# Altium PCB Tester_REV_0.PcbDoc (part 1 of 3)
Units mm, origin at the board's own origin, x right, y up, seen from the top; angles counter-clockwise.
Board outline 150 x 150 mm, 2 copper layers (Top Layer, Bottom Layer); 109 components, 101 nets, 433 pads, 87 vias.
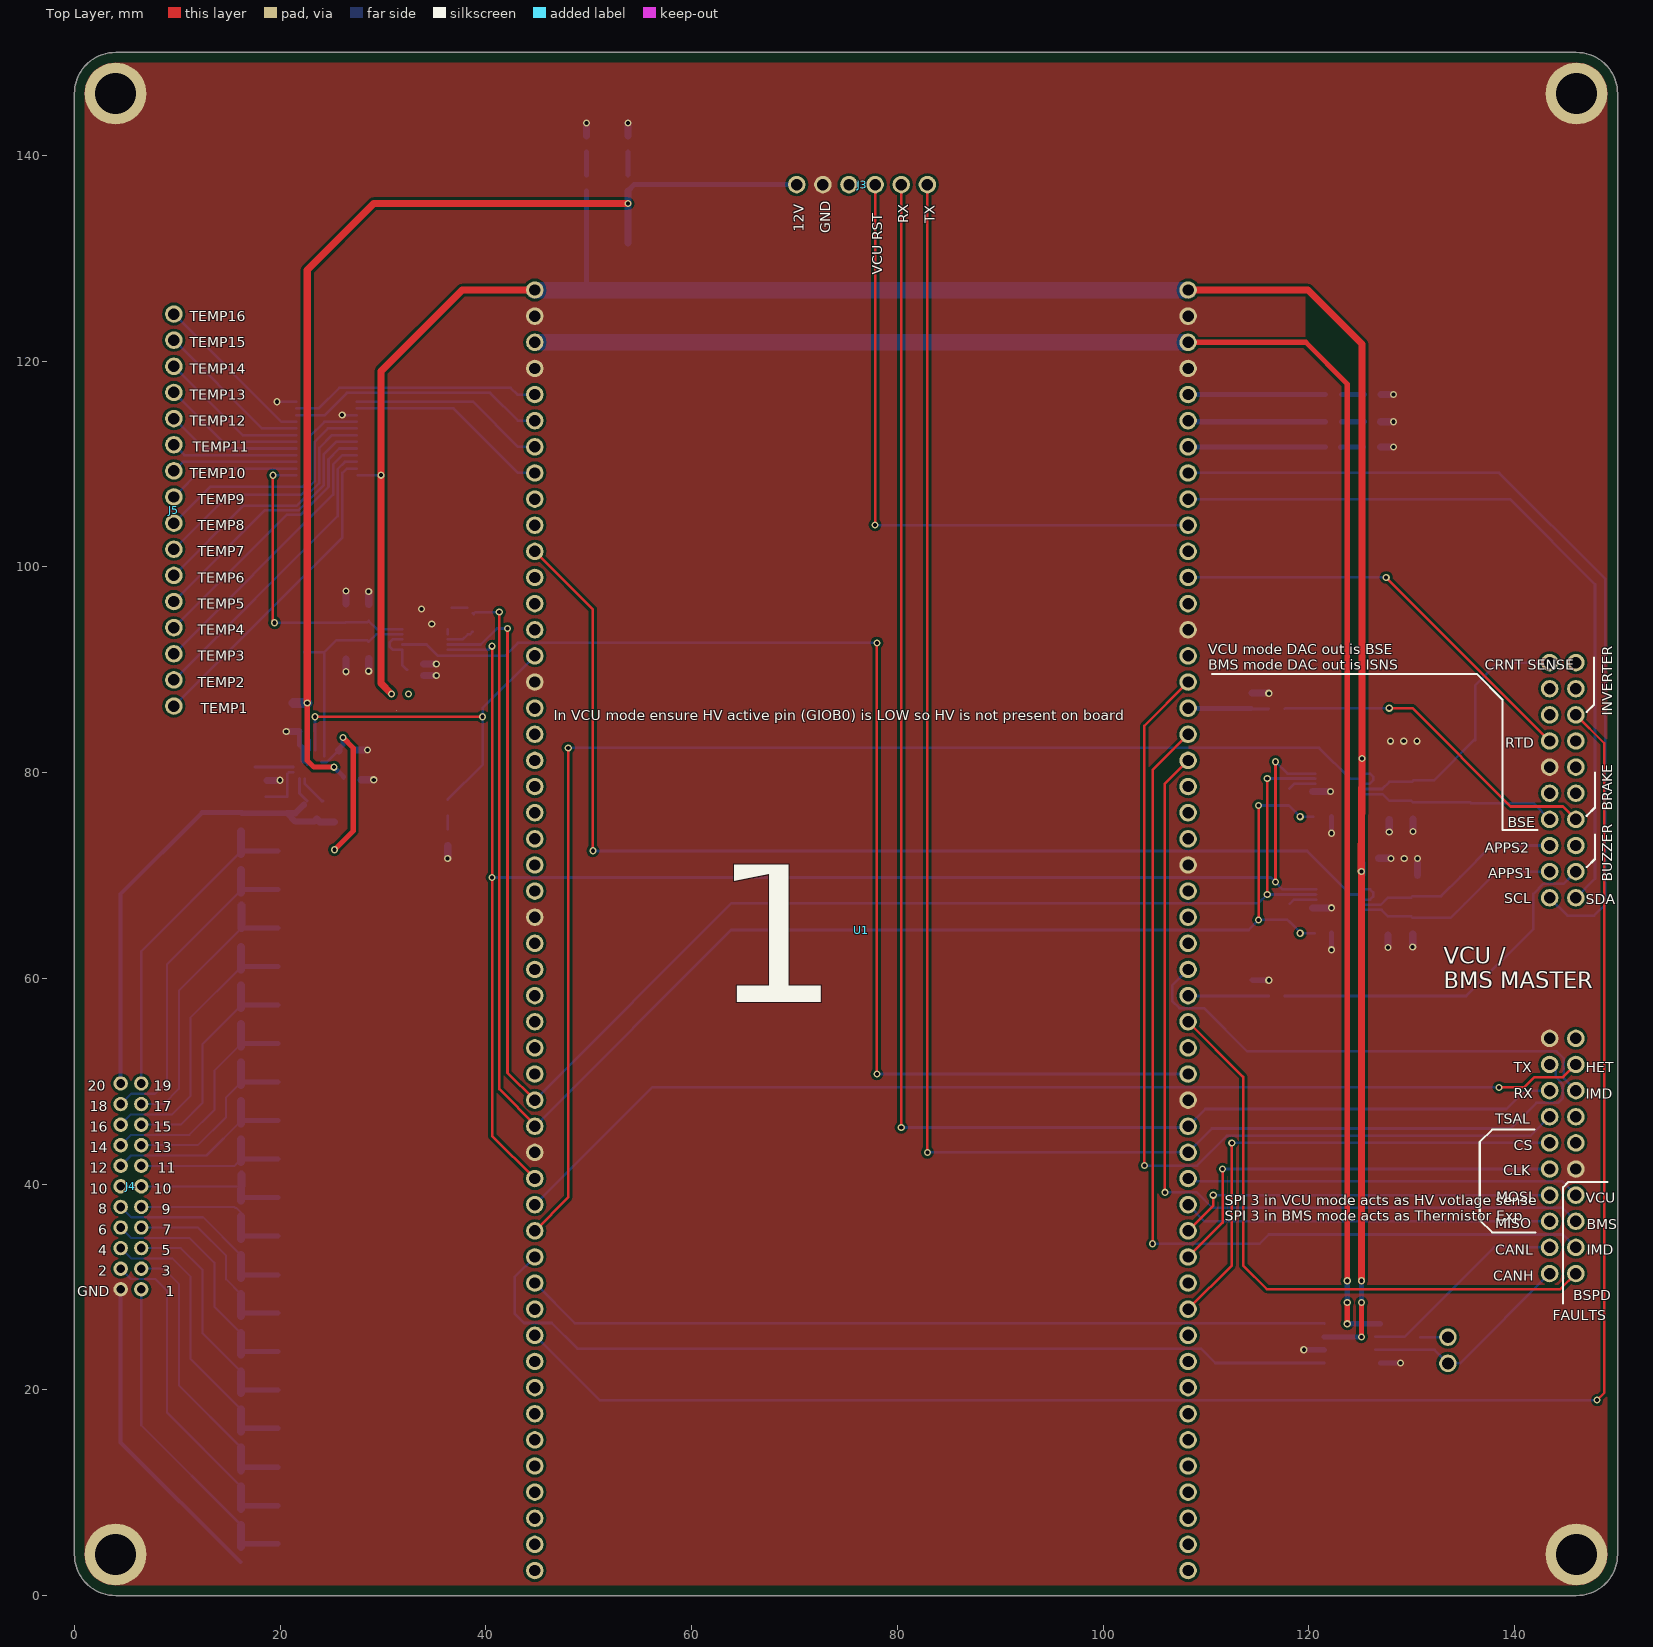
[diagram p0: Top Layer view]
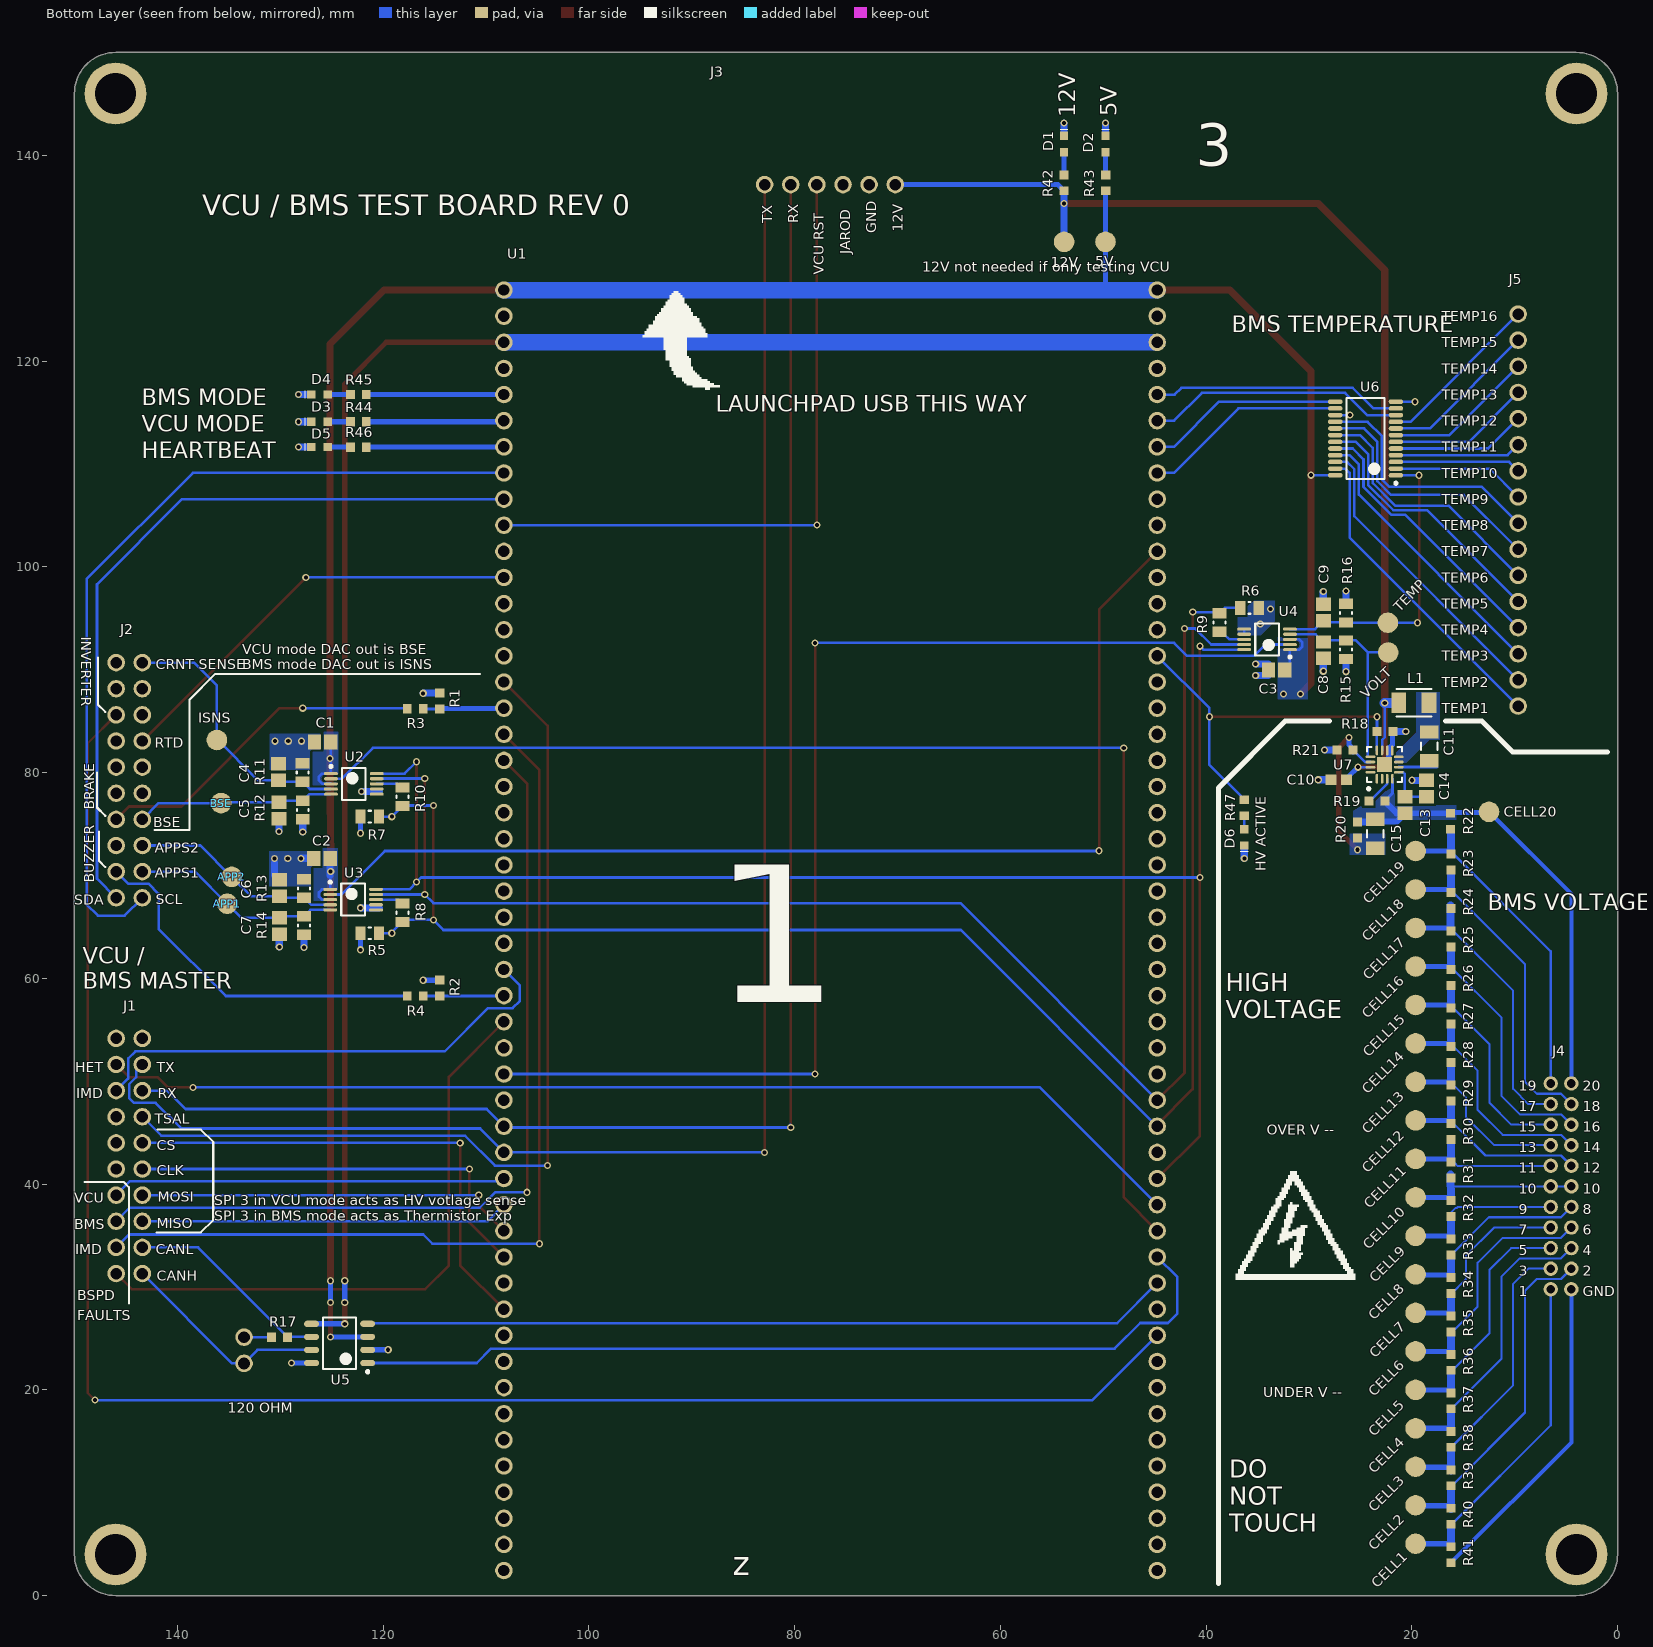
[diagram p1: Bottom Layer view, seen from below]
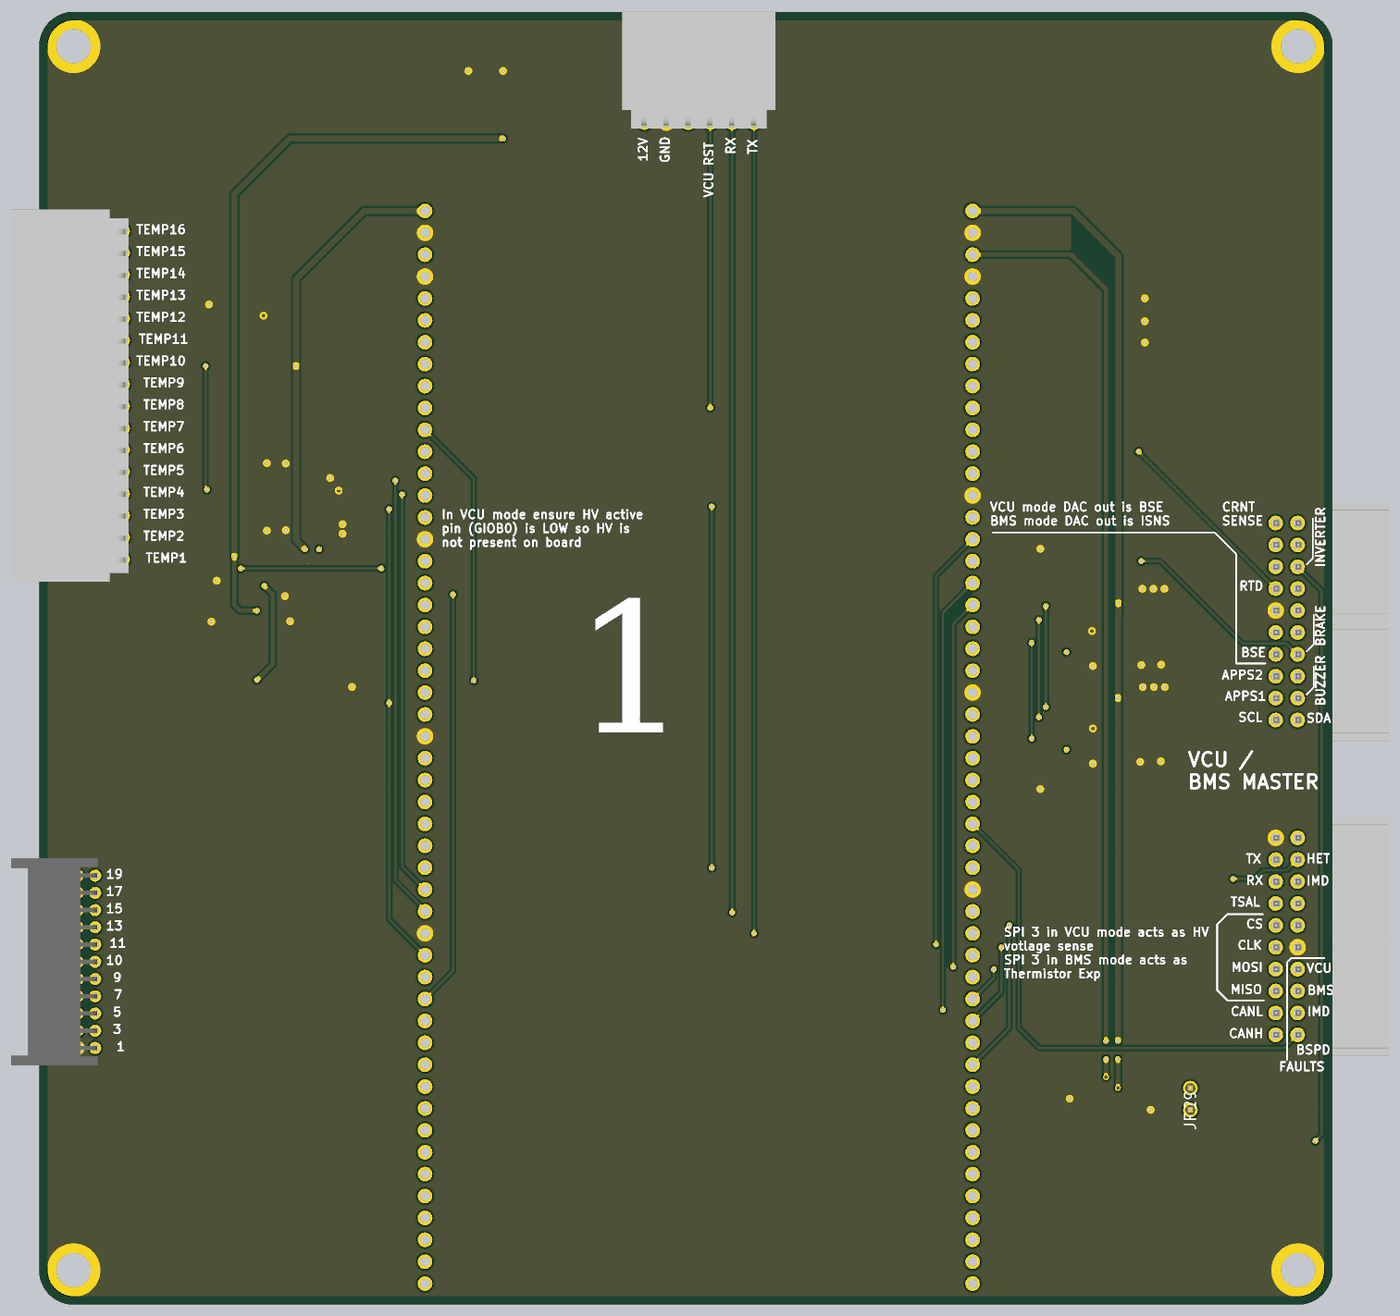
[diagram p3: 3D render of the assembled board from above, using the file's embedded part models]
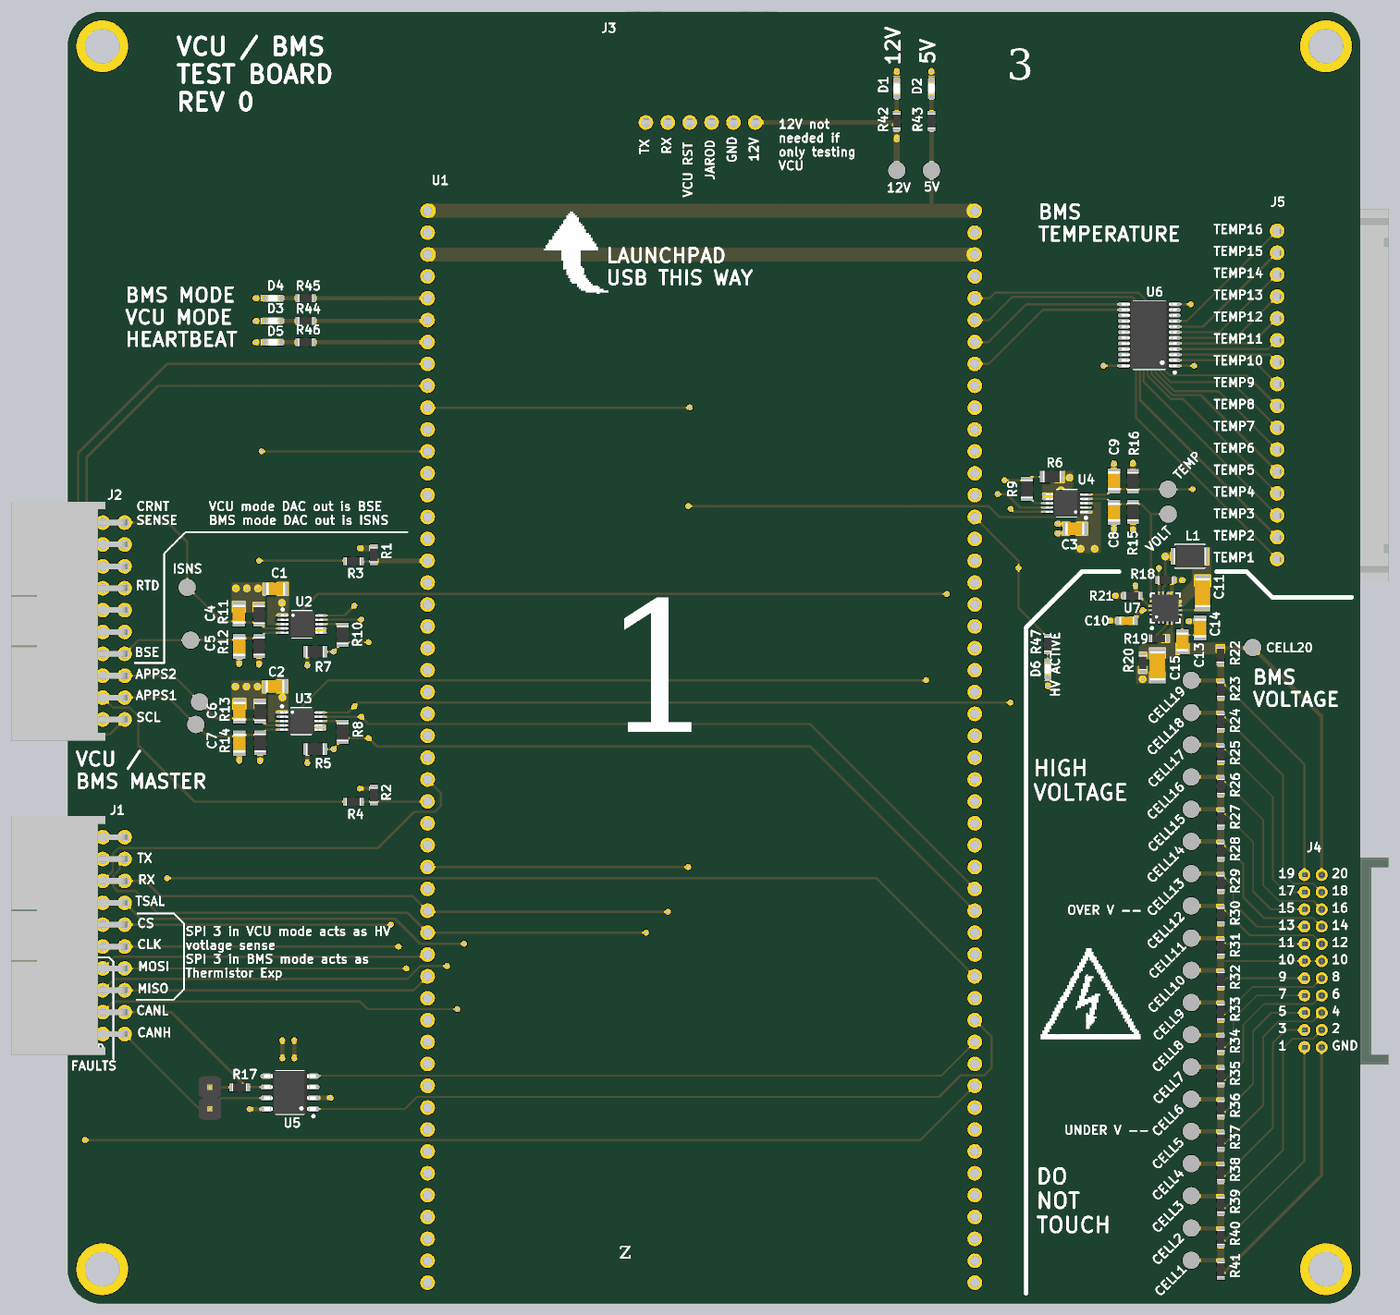
[diagram p4: 3D render of the assembled board from below, using the file's embedded part models]

## Layer stack, top to bottom
Top Solder: solder mask 0.0102, Solder Resist, Dk 3.5
Top Layer: signal copper 0.0356
Dielectric 1: dielectric 0.32, FR-4, Dk 4.8
Bottom Layer: signal copper 0.0356
Bottom Solder: solder mask 0.0102, Solder Resist, Dk 3.5

## Board outline
0,4 0,146 cw(c4,146) 4,150 146,150 cw(c146,146) 150,146 150,4 cw(c146,4) 146,0 4,0 cw(c4,4)

## Design rules (kind name [scope] priority, off if disabled: settings)
Clearance [All] p1: gap=0.254 ignorepadtopadclearanceinfootprint=FALSE except(0: Arc-Hole Track-Hole SMDPad-Hole THPad-Hole Via-Hole Fill-Hole Poly-Hole Region-Hole Text-Hole; 0.1: SMDPad-SMDPad; 0.15: Arc-Via Track-Via; 0.2: Arc-Arc Arc-Track Arc-SMDPad Arc-THPad Track-Track Track-SMDPad Track-THPad)
PlaneConnect [InNet('12V') or InNet('5V') or InNet('3V3') or InNet('GND')] p1: planeconnectstyle=Direct reliefexpansion=0.508 reliefentries=4 reliefconductorwidth=0.254 reliefairgap=0.254
PolygonConnect PolygonConnect_1 [InNet('12V') or InNet('5V') or InNet('3V3') or InNet('GND')] p1: connectstyle=Direct reliefconductorwidth=0.254 reliefentries=4 polygonreliefangle="90 Angle" airgapwidth=0.254
PolygonConnect PolygonConnect_2 [InNet('SW') or InNet('FB') or InNet('Batt_Volt')] p2: thpad.connectstyle=Relief thpad.reliefconductorwidth=0.254 thpad.reliefentries=4 thpad.polygonreliefangle="90 Angle" thpad.airgapwidth=0.254 smdpad.connectstyle=Direct smdpad.reliefconductorwidth=1 smdpad.reliefentries=4 smdpad.polygonreliefangle="90 Angle" smdpad.airgapwidth=0.254 via.connectstyle=Direct via.reliefconductorwidth=0.254 via.reliefentries=4 via.polygonreliefangle="90 Angle" via.airgapwidth=0.254
PolygonConnect [All] p3: connectstyle=Relief reliefconductorwidth=0.254 reliefentries=4 polygonreliefangle="90 Angle" airgapwidth=0.254
RoutingVias [All] p1: holewidth=0.4 width=0.7 viastyle="Through Hole" minholewidth=0.3 minwidth=0.6 maxholewidth=1 maxwidth=2
SolderMaskExpansion [All] p1: expansion=0.102
Width [All] p1: maxlimit=3 minlimit=0.15 preferedwidth=0.254 minimp=50.000000 maximp=50.000000 favimp=50.000000
29 further rules are at their usual default settings.

## Classes and differential pairs
net class CELL[19..0]: CELL1 CELL2 CELL3 CELL4 CELL5 CELL6 CELL7 CELL8 CELL9 CELL10 CELL11 CELL12 CELL13 CELL14 CELL15 CELL16 CELL17 CELL18 CELL19
component class U_Launchpad: D1 D2 D3 D4 D5 R1 R2 R3 R4 R42 R43 R44 R45 R46
component class U_DAC: 5V APP1 APP2 BSE C1 C2 C3 C4 C5 C6 C7 C8 C9 ISNS R5 R6 R7 R8 R9 R10 R11 R12 R13 R14 R15 R16 TEMP U2 U3 U4 VOLT
component class U_Connectors: 12v J1 J2 J3 J4 J5
component class U_CAN: R17 U5
component class U_BMS_Voltage: C10 C11 C13 C14 C15 CELL20 JP1 JP2 JP3 JP4 JP5 JP6 JP7 JP8 JP9 JP10 JP11 JP12 JP13 JP14 JP15 JP16 JP17 JP18 JP19 L1 R18 R19 R20 R21 R22 R23 R24 R25 R26 R27 R28 R29 R30 R31 R32 R33 R34 R35 R36 R37 R38 R39 R40 R41 U7
component class U_BMS_Temp: U6

## Components (designator, comment, footprint, x,y, rotation, side; value= is the part's Value field where it differs from the comment)
5V "Testpoint2" TP2 49.78,131.585 r90 bottom (schematic designator JP21)
12V "Testpoint2" TP2 53.799,131.585 r90 bottom (schematic designator JP28)
"120 OHM" "732-5315-ND" 2PIN-JP 133.5,22.578 r90 bottom (schematic designator JP29)
APP1 "Testpoint2" TP2 135.143,67.249 r270 bottom (schematic designator JP25)
APP2 "Testpoint2" TP2 134.709,69.864 r270 bottom (schematic designator JP24)
BSE "Testpoint2" TP2 135.743,77.034 r270 bottom (schematic designator JP23)
C1 "0.1uF" CAP-0805 125.865,82.985 r180 bottom
C2 "0.1uF" CAP-0805 125.944,71.663 r180 bottom
C3 "0.1uF" CAP-0805 33.14,89.979 r180 bottom
C4 "100nF" CAP-0805 130.149,80.049 r90 bottom
C5 "100nF" CAP-0805 130.107,76.299 r90 bottom
C6 "100nF" CAP-0805 130.078,68.784 r90 bottom
C7 "100nF" CAP-0805 130.078,65.075 r90 bottom
C8 "100nF" CAP-0805 28.604,91.895 r270 bottom
C9 "100nF" CAP-0805 28.604,95.545 r270 bottom
C10 "1uF" CAP-0603 27.11,79.293 r180 bottom
C11 "0.1uF" CAP-1206 18.31,82.548 r90 bottom
C13 "0.47uF" CAP-0805 20.673,76.843 r270 bottom
C14 "0.47uF" CAP-0805 18.59,78.453 r270 bottom
C15 "0.1uF" CAP-1206 23.565,74.059 r90 bottom
CELL1 "Testpoint2" TP2 19.633,5.04 r180 bottom (schematic designator JP1)
CELL2 "Testpoint2" TP2 19.633,8.781 r180 bottom (schematic designator JP2)
CELL3 "Testpoint2" TP2 19.633,12.521 r180 bottom (schematic designator JP3)
CELL4 "Testpoint2" TP2 19.633,16.262 r180 bottom (schematic designator JP4)
CELL5 "Testpoint2" TP2 19.633,20.003 r180 bottom (schematic designator JP5)
CELL6 "Testpoint2" TP2 19.633,23.744 r180 bottom (schematic designator JP6)
CELL7 "Testpoint2" TP2 19.633,27.485 r180 bottom (schematic designator JP7)
CELL8 "Testpoint2" TP2 19.633,31.225 r180 bottom (schematic designator JP8)
CELL9 "Testpoint2" TP2 19.633,34.966 r180 bottom (schematic designator JP9)
CELL10 "Testpoint2" TP2 19.633,38.707 r90 bottom (schematic designator JP10)
CELL11 "Testpoint2" TP2 19.633,42.448 r90 bottom (schematic designator JP11)
CELL12 "Testpoint2" TP2 19.633,46.189 r90 bottom (schematic designator JP12)
CELL13 "Testpoint2" TP2 19.633,49.929 r90 bottom (schematic designator JP13)
CELL14 "Testpoint2" TP2 19.633,53.67 r90 bottom (schematic designator JP14)
CELL15 "Testpoint2" TP2 19.633,57.411 r90 bottom (schematic designator JP15)
CELL16 "Testpoint2" TP2 19.633,61.152 r90 bottom (schematic designator JP16)
CELL17 "Testpoint2" TP2 19.633,64.893 r90 bottom (schematic designator JP17)
CELL18 "Testpoint2" TP2 19.633,68.633 r90 bottom (schematic designator JP18)
CELL19 "Testpoint2" TP2 19.633,72.374 r90 bottom (schematic designator JP19)
CELL20 "Testpoint2" TP2 12.5,76.185 r90 bottom (schematic designator JP20)
D1 "Blue" LED-0603 54.6,142.3 r270 bottom
D2 "Green" LED-0603 50.58,142.3 r270 bottom
D3 "Blue" LED-0603 127.381,113.295 r180 bottom
D4 "Yellow" LED-0603 127.381,115.955 r180 bottom
D5 "Red" LED-0603 127.381,110.83 r180 bottom
D6 "Red" LED-0603 35.485,72.5 r90 bottom
ISNS "Testpoint2" TP2 136.143,83.164 r270 bottom (schematic designator JP22)
J1 "WM8268-ND" 2X10PIN 145.937,54.165 r270 bottom
J2 "WM8268-ND" 2X10PIN 145.937,90.69 r270 bottom
J3 "WM4928-ND" 6PIN 82.911,137.149 r180 top
J4 "H10253-ND" 2X11PIN 6.5,29.779 r90 top
J5 "WM4914-ND" 16PIN 9.669,124.565 r270 top
L1 "10uH" IND-3.2x2.5x2.2 19.801,86.785 r180 bottom
R1 "5K" RES-0603 114.479,86.95 r270 bottom
R2 "5K" RES-0603 114.479,59.055 r270 bottom
R3 "15K" RES-0603 116.864,86.2 r0 bottom
R4 "15K" RES-0603 116.864,58.28 r0 bottom
R5 "2K" RES-0805 121.294,64.385 r180 bottom
R6 "2K" RES-0805 35.789,96.009 r0 bottom
R7 "2K" RES-0805 121.294,75.714 r180 bottom
R8 "1K" RES-0805 118.108,66.375 r90 bottom
R9 "1K" RES-0805 38.704,94.595 r270 bottom
R10 "1K" RES-0805 118.108,77.649 r90 bottom
R11 "10k" RES-0805 127.813,79.999 r90 bottom
R12 "10k" RES-0805 127.807,76.349 r90 bottom
R13 "10k" RES-0805 127.678,68.734 r90 bottom
R14 "10k" RES-0805 127.678,65.125 r90 bottom
R15 "10k" RES-0805 26.404,91.945 r270 bottom
R16 "10k" RES-0805 26.404,95.495 r270 bottom
R17 "120R" RES-0603 130.064,25.118 r0 bottom
R18 "10K" RES-0603 22.61,83.998 r0 bottom
R19 "0R" RES-0603 23.394,77.236 r180 bottom
R20 "665K" RES-0603 25.276,74.409 r90 bottom
R21 "8.06K" RES-0603 26.49,82.201 r180 bottom
R22 "10K" RES-0603 16.25,75.27 r90 bottom
R23 "10K" RES-0603 16.2,71.299 r90 bottom
R24 "10K" RES-0603 16.2,67.558 r90 bottom
R25 "10K" RES-0603 16.2,63.818 r90 bottom
R26 "10K" RES-0603 16.2,60.077 r90 bottom
R27 "10K" RES-0603 16.2,56.336 r90 bottom
R28 "10.5K" RES-0603 16.2,52.595 r90 bottom
R29 "10K" RES-0603 16.2,48.854 r90 bottom
R30 "10K" RES-0603 16.2,45.114 r90 bottom
R31 "10K" RES-0603 16.2,41.373 r90 bottom
R32 "10K" RES-0603 16.2,37.632 r90 bottom
R33 "10K" RES-0603 16.2,33.891 r90 bottom
R34 "10K" RES-0603 16.2,30.15 r90 bottom
R35 "9.5K" RES-0603 16.2,26.41 r90 bottom
R36 "10K" RES-0603 16.2,22.669 r90 bottom
R37 "10K" RES-0603 16.2,18.928 r90 bottom
R38 "10K" RES-0603 16.2,15.187 r90 bottom
R39 "10K" RES-0603 16.2,11.446 r90 bottom
R40 "10K" RES-0603 16.2,7.706 r90 bottom
R41 "10K" RES-0603 16.2,3.965 r90 bottom
R42 "2K" RES-0603 53.8,137.315 r270 bottom
R43 "665R" RES-0603 49.764,137.315 r270 bottom
R44 "22R" RES-0603 122.395,114.095 r180 bottom
R45 "22R" RES-0603 122.395,116.755 r180 bottom
R46 "22R" RES-0603 122.395,111.63 r180 bottom
R47 "22R" RES-0603 36.285,76.585 r90 bottom
TEMP "Testpoint2" TP2 22.335,94.56 r270 bottom (schematic designator JP27)
U1 "LAUNCHXL2-TMS57012" Hercules 44.751,126.9 r270 top
U2 "MCP48FVB02-E/UN DAC1" 10MSOP 122.837,78.9 r180 bottom
U3 "MCP48FVB02-E/UN DAC2" 10MSOP 122.908,67.65 r180 bottom
U4 "MCP48FVB02-E/UN DAC3" 10MSOP 34.075,92.944 r0 bottom
U5 "MCP2562T-E/SNCT-ND" "8-SOIC w/o THRM" 124.219,24.515 r0 bottom
U6 "74HC4067PW,118" 24-TSSOP 24.5,112.47 r0 bottom
U7 "LT3482EUD#TRPBF" "QFN-16 (3x3mm)" 22.646,80.774 r90 bottom
VOLT "Testpoint2" TP2 22.297,91.669 r270 bottom (schematic designator JP26)

## Footprints (in the part's own frame and the unit in brackets; to place one, negate y for a bottom-side part, rotate by r counter-clockwise, add the part's x,y. Pads: shape width x height; smd on the part's side, far side on the other; paste and mask are expansions set on the pad)
2PIN-JP [mm]
  round 1.7 hole 1.15: 1(0,0) 2(2.54,0)
  body extent -1.24,-1.27 3.84,1.27, height 8.57
2X10PIN [mm]
  round 1.7 hole 1.11: 1(0,0) 2(2.54,0) 3(5.08,0) 4(7.62,0) 5(10.16,0) 6(12.7,0) 7(15.24,0) 8(17.78,0) 9(20.32,0) 10(22.86,0) 11(22.86,2.54) 12(20.32,2.54) 13(17.78,2.54) 14(15.24,2.54) 15(12.7,2.54) 16(10.16,2.54) 17(7.62,2.54) 18(5.08,2.54) 19(2.54,2.54) 20(0,2.54)
  body extent -2.44,-10.6 25.3,2.8, height 9.88
2X11PIN [mm]
  round 1.4 hole 0.85: 1(0,0) 2(2,0) 3(4,0) 4(6,0) 5(8,0) 6(10,0) 7(12,0) 8(14,0) 9(16,0) 10(18,0) 11(20,0) 12(20,2) 13(18,2) 14(16,2) 15(14,2) 16(12,2) 17(10,2) 18(8,2) 19(6,2) 20(4,2) 21(2,2) 22(0,2)
  body extent -2,-0.27 22,9.73, height 5.66
6PIN [mm]
  round 1.7 hole 1.11: 1(0,0) 2(2.54,0) 3(5.08,0) 4(7.62,0) 5(10.16,0) 6(12.7,0)
  body extent -2.48,-12.89 15.3,0.7, height 7.06
"8-SOIC w/o THRM" [mm] "SOIC, 8-Leads, Body 4.90x3.90mm, Pitch 1.27mm, IPC Medium Density"
  oval 1.45x0.6 smd: 1(-2.725,1.905) 2(-2.725,0.635) 3(-2.725,-0.635) 4(-2.725,-1.905) 5(2.725,-1.905) 6(2.725,-0.635) 7(2.725,0.635) 8(2.725,1.905)
  silkscreen extent -2.85,-2.5 1.6,2.88, body extent -3,-2.5 3,2.5, height 1.7
10MSOP [mm] "TSSOP, 10-Leads, Body 3.00x3.00mm, Pitch 0.50mm, IPC Medium Density"
  oval 1.35x0.3 smd: 1(-2.225,1) 2(-2.225,0.5) 3(-2.225,0) 4(-2.225,-0.5) 5(-2.225,-1) 6(2.225,-1) 7(2.225,-0.5) 8(2.225,0) 9(2.225,0.5) 10(2.225,1)
  silkscreen extent -2.35,-1.55 1.15,1.82, body extent -2.45,-1.55 2.45,1.55, height 1.1
16PIN [mm]
  round 1.7 hole 1.11: 1(0,0) 2(2.54,0) 3(5.08,0) 4(7.62,0) 5(10.16,0) 6(12.7,0) 7(15.24,0) 8(17.78,0) 9(20.32,0) 10(22.86,0) 11(25.4,0) 12(27.94,0) 13(30.48,0) 14(33.02,0) 15(35.56,0) 16(38.1,0)
  body extent -2.48,-12.89 40.7,0.69, height 7.06
24-TSSOP [mm] "TSOP, 24-Leads, Body 7.80x4.40mm, Pitch 0.65mm, IPC Medium Density"
  oval 1.4x0.45 smd: 1(-2.95,3.575) 2(-2.95,2.925) 3(-2.95,2.275) 4(-2.95,1.625) 5(-2.95,0.975) 6(-2.95,0.325) 7(-2.95,-0.325) 8(-2.95,-0.975) 9(-2.95,-1.625) 10(-2.95,-2.275) 11(-2.95,-2.925) 12(-2.95,-3.575) 13(2.95,-3.575) 14(2.95,-2.925) 15(2.95,-2.275) 16(2.95,-1.625) 17(2.95,-0.975) 18(2.95,-0.325) 19(2.95,0.325) 20(2.95,0.975) 21(2.95,1.625) 22(2.95,2.275) 23(2.95,2.925) 24(2.95,3.575)
  silkscreen extent -3.07,-3.95 1.85,4.47, body extent -3.2,-3.95 3.2,3.95, height 1.1
CAP-0603 [mm] "Chip Capacitor, 2-Leads, Body 1.60x0.80mm, IPC Medium Density"
  rect 1.05x1 smd: 1(-0.75,0) 2(0.75,0)
  body extent -0.87,-0.48 0.88,0.47, height 0.9
CAP-0805 [mm] "Chip Capacitor, 2-Leads, Body 2.00x1.25mm, IPC Medium Density"
  rect 1.3x1.45 smd: 1(-0.8,0) 2(0.8,0)
  body extent -1.1,-0.72 1.1,0.72, height 1.35
CAP-1206 [mm] "Chip Capacitor, 2-Leads, Body 3.20x1.60mm, IPC Medium Density"
  rect 1.3x1.8 smd: 1(-1.4,0) 2(1.4,0)
  silkscreen extent -0.35,-0.8 0.35,0.8, body extent -1.7,-0.9 1.7,0.9, height 1.7
Hercules [mm]
  round 1.7 hole 1.1: 1(0,0) 2(2.54,0) 3(5.08,0) 4(7.62,0) 5(10.16,0) 6(12.7,0) 7(15.24,0) 8(17.78,0) 9(20.32,0) 10(22.86,0) 11(25.4,0) 12(27.94,0) 13(30.48,0) 14(33.02,0) 15(35.56,0) 16(38.1,0) 17(40.64,0) 18(43.18,0) 19(45.72,0) 20(48.26,0) 21(50.8,0) 22(53.34,0) 23(55.88,0) 24(58.42,0) 25(60.96,0) 26(63.5,0) 27(66.04,0) 28(68.58,0) 29(71.12,0) 30(73.66,0) 31(76.2,0) 32(78.74,0) 33(81.28,0) 34(83.82,0) 35(86.36,0) 36(88.9,0) 37(91.44,0) 38(93.98,0) 39(96.52,0) 40(99.06,0) 41(101.6,0) 42(104.14,0) 43(106.68,0) 44(109.22,0) 45(111.76,0) 46(114.3,0) 47(116.84,0) 48(119.38,0) 49(121.92,0) 50(124.46,0) 51(0,63.5) 52(2.54,63.5) 53(5.08,63.5) 54(7.62,63.5) 55(10.16,63.5) 56(12.7,63.5) 57(15.24,63.5) 58(17.78,63.5) 59(20.32,63.5) 60(22.86,63.5) 61(25.4,63.5) 62(27.94,63.5) 63(30.48,63.5) 64(33.02,63.5) 65(35.56,63.5) 66(38.1,63.5) 67(40.64,63.5) 68(43.18,63.5) 69(45.72,63.5) 70(48.26,63.5) 71(50.8,63.5) 72(53.34,63.5) 73(55.88,63.5) 74(58.42,63.5) 75(60.96,63.5) 76(63.5,63.5) 77(66.04,63.5) 78(68.58,63.5) 79(71.12,63.5) 80(73.66,63.5) 81(76.2,63.5) 82(78.74,63.5) 83(81.28,63.5) 84(83.82,63.5) 85(86.36,63.5) 86(88.9,63.5) 87(91.44,63.5) 88(93.98,63.5) 89(96.52,63.5) 90(99.06,63.5) 91(101.6,63.5) 92(104.14,63.5) 93(106.68,63.5) 94(109.22,63.5) 95(111.76,63.5) 96(114.3,63.5) 97(116.84,63.5) 98(119.38,63.5) 99(121.92,63.5) 100(124.46,63.5)
IND-3.2x2.5x2.2 [mm] "Molded Inductor, 2-Leads, Body 3.20x2.50mm, IPC Medium Density"
  rect 1.45x1.95 smd: 1(-1.475,0) 2(1.475,0)
  silkscreen extent -1.7,-1.35 1.7,1.35, body extent -1.92,-1.35 1.92,1.35, height 2.4
LED-0603 [mm]
  rect 0.8x0.8 smd: 1(2,0.8) 2(0.4,0.8)
  silkscreen extent -0.18,0.43 -0.18,1.17, body extent 0.4,0.4 2,1.2, height 0.7
"QFN-16 (3x3mm)" [mm] "QFN, 16-Leads, Body 3.00x3.00mm, Pitch 0.50mm, Thermal Pad 1.45x1.45mm, IPC Medium Density"
  oval 0.95x0.25 smd: 1(-1.375,0.75) 2(-1.375,0.25) 3(-1.375,-0.25) 4(-1.375,-0.75) 9(1.375,-0.75) 10(1.375,-0.25) 11(1.375,0.25) 12(1.375,0.75)
  oval 0.25x0.95 smd: 5(-0.75,-1.375) 6(-0.25,-1.375) 7(0.25,-1.375) 8(0.75,-1.375) 13(0.75,1.375) 14(0.25,1.375) 15(-0.25,1.375) 16(-0.75,1.375)
  rect 1.45x1.45 smd: 17(0,0)
  silkscreen extent -2.47,-1.7 1.7,1.7, body extent -1.55,-1.55 1.55,1.55, height 0.8
RES-0603 [mm] "Chip Resistor, 2-Leads, Body 1.60x0.80mm, IPC Medium Density"
  rect 0.85x0.9 smd: 1(-0.775,0) 2(0.775,0)
  body extent -0.85,-0.45 0.85,0.45, height 0.55
RES-0805 [mm] "Chip Resistor, 2-Leads, Body 2.00x1.25mm, IPC Medium Density"
  rect 1x1.35 smd: 1(-0.9,0) 2(0.9,0)
  silkscreen extent -0.1,-0.58 0.1,0.58, body extent -1.05,-0.68 1.05,0.67, height 0.6
TP2 [mm]
  round 2 smd: 1(0,0)

## Part data
5V 12V APP1 APP2 BSE CELL1 CELL2 CELL3 CELL4 CELL5 CELL6 CELL7 CELL8 CELL9 CELL10 CELL11 CELL12 CELL13 CELL14 CELL15 CELL16 CELL17 CELL18 CELL19 CELL20 ISNS TEMP VOLT: "Single layer pad TP"
"120 OHM": library part 2PIN-TEST, "CONN HEADER VERT 2POS 2.54MM"
C1 C2 C3: library part 0805-0.1uF-16V, "CAP CER 0.1UF 16V Y5V 0805", Capacitance=100nF, Case/Package=0805, Case Code (Metric)=2012, Dielectric=Y5V, Dielectric Material=Ceramic, Manufacturer=KEMET, Manufacturer Part Number=C0805C104Z4VACTU, Max Operating Temperature=85°C, Min Operating Temperature=-30°C, Package Quantity=1, Supplier Part Number 1=399-9159-6-ND, Tolerance=80%, Voltage Rating=16V, Case Code (Imperial)=0805, ComponentLink1Description=https://search.kemet.com/component-edge/download/datasheet/C0805C104Z4VACTU.pdf?src-supplier=Digi-Key, ComponentLink1URL=https://search.kemet.com/component-edge/download/datasheet/C0805C104Z4VACTU.pdf?src-supplier=Digi-Key, ComponentLink2Description=https://api.kemet.com/component-edge/download/datasheet/C0805C104Z4VACTU.pdf?src-supplier=Digi-Key, ComponentLink2URL=https://api.kemet.com/component-edge/download/datasheet/C0805C104Z4VACTU.pdf?src-supplier=Digi-Key, ComponentLink3Description=http://www.mouser.com/ds/2/212/KEM_C1005_Y5V_SMD-1101305.pdf?src-supplier=Mouser, ComponentLink3URL=http://www.mouser.com/ds/2/212/KEM_C1005_Y5V_SMD-1101305.pdf?src-supplier=Mouser, ComponentLink4Description=http://components.arrow.com/part/dataview/2091119S8993596N7429?src-supplier=Arrow, ComponentLink4URL=http://components.arrow.com/part/dataview/2091119S8993596N7429?src-supplier=Arrow, Depth=1.25mm, Height=0.78mm, Lead Free="Lead Free", Lead Pitch=0.75mm, Length=2mm, Mount="Surface Mount", Packaging="Tape and Reel", Pricing 1="1=0.11, 10=0.081, 100=0.038, 500=0.02664, 1000=0.02205 (USD)", Stock 1=18565, Supplier 1=Digi-Key, Termination=SMD/SMT, Thickness=0.035inch, Voltage Rating (DC)=16V, Width=0.049inch
C4 C5 C6 C7 C8 C9: library part 0805-0.1uF-16V, "CAP CER 0.1UF 16V Y5V 0805", Case/Package=0805, Case Code (Metric)=2012, Dielectric=Y5V, Dielectric Material=Ceramic, Manufacturer=KEMET, Manufacturer Part Number=C0805C104Z4VACTU, Max Operating Temperature=85°C, Min Operating Temperature=-30°C, Package Quantity=1, Supplier Part Number 1=399-9159-6-ND, Tolerance=80%, Voltage Rating=16V, Capacitance=100nF, Case Code (Imperial)=0805, ComponentLink1Description=https://search.kemet.com/component-edge/download/datasheet/C0805C104Z4VACTU.pdf?src-supplier=Digi-Key, ComponentLink1URL=https://search.kemet.com/component-edge/download/datasheet/C0805C104Z4VACTU.pdf?src-supplier=Digi-Key, ComponentLink2Description=https://api.kemet.com/component-edge/download/datasheet/C0805C104Z4VACTU.pdf?src-supplier=Digi-Key, ComponentLink2URL=https://api.kemet.com/component-edge/download/datasheet/C0805C104Z4VACTU.pdf?src-supplier=Digi-Key, ComponentLink3Description=http://www.mouser.com/ds/2/212/KEM_C1005_Y5V_SMD-1101305.pdf?src-supplier=Mouser, ComponentLink3URL=http://www.mouser.com/ds/2/212/KEM_C1005_Y5V_SMD-1101305.pdf?src-supplier=Mouser, ComponentLink4Description=http://components.arrow.com/part/dataview/2091119S8993596N7429?src-supplier=Arrow, ComponentLink4URL=http://components.arrow.com/part/dataview/2091119S8993596N7429?src-supplier=Arrow, Depth=1.25mm, Height=0.78mm, Lead Free="Lead Free", Lead Pitch=0.75mm, Length=2mm, Mount="Surface Mount", Packaging="Tape and Reel", Pricing 1="1=0.11, 10=0.081, 100=0.038, 500=0.02664, 1000=0.02205 (USD)", Stock 1=18565, Supplier 1=Digi-Key, Termination=SMD/SMT, Thickness=0.035inch, Voltage Rating (DC)=16V, Width=0.049inch
C10: library part 0603-1uF-16V, "CAP CER 1UF 16V X7R 0603", Case/Package=0603, Case Code (Metric)=1608, Dielectric=X7R, Dielectric Material=Ceramic, Manufacturer=KEMET, Manufacturer Part Number=C0603C105K4RACTU, Max Operating Temperature=125°C, Min Operating Temperature=-55°C, Package Quantity=4000, Supplier Part Number 1=399-7847-6-ND, Tolerance=10%, Voltage=16V, Capacitance=1uF, Case Code (Imperial)=0603, ComponentLink1Description=http://www.mouser.com/ds/2/212/KEM_C1002_X7R_SMD-1102033.pdf?src-supplier=Mouser, ComponentLink1URL=http://www.mouser.com/ds/2/212/KEM_C1002_X7R_SMD-1102033.pdf?src-supplier=Mouser, ComponentLink2Description=http://www.kemet.com/kemet/web/homepage/kechome.nsf/file/Commercial%20Ceramic%20Chips%20X7R%20Dielectric/$file/KEM_C1002_X7R_SMD.pdf?src-supplier=Element14, ComponentLink2URL=http://www.kemet.com/kemet/web/homepage/kechome.nsf/file/Commercial%20Ceramic%20Chips%20X7R%20Dielectric/$file/KEM_C1002_X7R_SMD.pdf?src-supplier=Element14, ComponentLink3Description=https://www.verical.com/server-webapp/html/getDatasheet?partID=385479&src-supplier=Verical, ComponentLink3URL=https://www.verical.com/server-webapp/html/getDatasheet?partID=385479&src-supplier=Verical, ComponentLink4Description=http://www.kemet.com/kemet/web/homepage/kechome.nsf/vapubfiles/KEM_C1002_X7R_SMD.pdf/$file/KEM_C1002_X7R_SMD.pdf?src-supplier=Element14, ComponentLink4URL=http://www.kemet.com/kemet/web/homepage/kechome.nsf/vapubfiles/KEM_C1002_X7R_SMD.pdf/$file/KEM_C1002_X7R_SMD.pdf?src-supplier=Element14, Contact Plating=Tin,Matte, Depth=0.8mm, Dissipation Factor=3.5%, Height=0.8mm, Length=1.6mm, Mount="Surface Mount,PCB", Number of Pins=2, Packaging="Tape and Reel", Pricing 1="1=0.12, 10=0.088, 100=0.0391, 500=0.02792, 1000=0.02193 (USD)", Radiation Hardening=No, REACH SVHC="No SVHC", Stock 1=600463, Supplier 1=Digi-Key, Termination=SMD/SMT, Thickness=0.034inch, Voltage Rating=16V, Voltage Rating (DC)=16V, Width=0.031inch
C11 C15: library part 1206-0.1uF-100V, "CAP CER 0.1UF 100V X7R 1206", Capacitance=100nF, Case/Package=1206, Case Code (Metric)=3216, Dielectric=X7R, Dielectric Material=Ceramic, Manufacturer=KEMET, Manufacturer Part Number=C1206C104K1RACTU, Max Operating Temperature=125°C, Min Operating Temperature=-55°C, Package Quantity=1, Supplier Part Number 1=399-1805-6-ND, Tolerance=10%, Voltage=100V, Case Code (Imperial)=1206, ComponentLink1Description=http://www.farnell.com/datasheets/2740715.pdf?src-supplier=Element14, ComponentLink1URL=http://www.farnell.com/datasheets/2740715.pdf?src-supplier=Element14, ComponentLink2Description=https://search.kemet.com/component-edge/download/datasheet/C1206C104K1RACTU.pdf?src-supplier=Allied+Electronics, ComponentLink2URL=https://search.kemet.com/component-edge/download/datasheet/C1206C104K1RACTU.pdf?src-supplier=Allied+Electronics, Contact Plating=Tin,Matte, Depth=1.6mm, Height=0.78mm, Length=3.2mm, Mount="Surface Mount,PCB", Number of Pins=2, Packaging="Tape and Reel", Pricing 1="1=0.28, 10=0.19, 100=0.1075, 500=0.0759, 1000=0.06641 (USD)", Radiation Hardening=No, REACH SVHC="No SVHC", Stock 1=407754, Supplier 1=Digi-Key, Termination=SMD/SMT, Thickness=0.035inch, Voltage Rating=100V, Voltage Rating (DC)=100V, Width=1.6mm
C13 C14: library part 0805-0.47uF-100V, "CAP CER 0.47UF 100V X7S 0805", Capacitance=470nF, Case/Package=0805, Case Code (Metric)=2012, Dielectric=X7S, Manufacturer=TDK, Manufacturer Part Number=C2012X7S2A474M125AB, Max Operating Temperature=125°C, Min Operating Temperature=-55°C, Package Quantity=1, Resistor Type=Ceramic, Supplier Part Number 1=445-5204-6-ND, Tolerance=20%, Voltage Rating=100V, Case Code (Imperial)=0805, ComponentLink1Description=http://www.mouser.com/ds/2/400/lcc_commercial_general_en-837201.pdf?src-supplier=Mouser, ComponentLink1URL=http://www.mouser.com/ds/2/400/lcc_commercial_general_en-837201.pdf?src-supplier=Mouser, Depth=1.25mm, Length=2mm, Mount="Surface Mount", Number of Pins=2, Packaging="Tape and Reel", Pricing 1="1=0.44, 10=0.303, 50=0.2118, 100=0.1815, 500=0.13612, 1000=0.11495 (USD)", Stock 1=8557, Supplier 1=Digi-Key, Termination=SMD/SMT, Thickness=0.057inch, Voltage Rating (DC)=100V, Weight=0.000194oz, Width=0.049inch
D1 D3: library part LED-Blue, "LED BLUE CLEAR 0603 SMD", Case/Package=0603, Case Code (Metric)=1608, Forward Current=30mA, Forward Voltage=3.2V, Manufacturer="Wurth Electronics", Manufacturer Part Number=150060BS75000, Max Operating Temperature=85°C, Min Operating Temperature=-40°C, Package Quantity=4000, Supplier Part Number 1=732-4966-6-ND, Test Current=20mA, Case Code (Imperial)=0603, Color=Blue, ComponentLink1Description=https://www.distrelec.biz/Web/Downloads/_t/ds/150060BS75000_eng_tds.pdf?mime=application%2Fpdf&src-supplier=Distrelec, ComponentLink1URL=https://www.distrelec.biz/Web/Downloads/_t/ds/150060BS75000_eng_tds.pdf?mime=application%2Fpdf&src-supplier=Distrelec, ComponentLink2Description=https://katalog.we-online.de/led/datasheet/150060BS75000.pdf?src-supplier=Digi-Key, ComponentLink2URL=https://katalog.we-online.de/led/datasheet/150060BS75000.pdf?src-supplier=Digi-Key, ComponentLink3Description=http://www.farnell.com/datasheets/1911343.pdf?src-supplier=Element14, ComponentLink3URL=http://www.farnell.com/datasheets/1911343.pdf?src-supplier=Element14, ComponentLink4Description=http://www.produktinfo.conrad.com/datenblaetter/750000-774999/759426-da-01-en-CHIPLED_0603_W_KL_BLAU_150060BS75000.pdf?src-supplier=Conrad, ComponentLink4URL=http://www.produktinfo.conrad.com/datenblaetter/750000-774999/759426-da-01-en-CHIPLED_0603_W_KL_BLAU_150060BS75000.pdf?src-supplier=Conrad, Dominant Wavelength=470nm, Height=0.7mm, Length=1.6mm, Lens Style=Clear,Rectangular, Luminous Intensity=145mcd, Mount="Surface Mount", Packaging="Cut Tape", Pricing 1="1=0.16, 50=0.145, 100=0.125, 500=0.108 (USD)", REACH SVHC=Unknown, Stock 1=46078, Supplier 1=Digi-Key, Viewing Angle=140°, Wavelength=470nm, Width=0.8mm
D2: library part LED-Green, "LED GREEN CLEAR 0603 SMD", Case/Package=0603, Case Code (Metric)=1608, Forward Current=30mA, Forward Voltage=2V, Manufacturer="Wurth Electronics", Manufacturer Part Number=150060VS75000, Max Operating Temperature=85°C, Min Operating Temperature=-40°C, Package Quantity=1, Supplier Part Number 1=732-4980-1-ND, Test Current=20mA, Case Code (Imperial)=0603, Color=Green, ComponentLink1Description=https://katalog.we-online.de/led/datasheet/150060VS75000.pdf?src-supplier=Digi-Key, ComponentLink1URL=https://katalog.we-online.de/led/datasheet/150060VS75000.pdf?src-supplier=Digi-Key, Dominant Wavelength=570nm, Height=0.7mm, Length=1.6mm, Lens Style=Clear,Rectangular, Luminous Intensity=40mcd, Mount="Surface Mount", Number of Pins=2, Packaging="Tape and Reel", Pricing 1="1=0.14, 50=0.133, 100=0.114, 500=0.099 (USD)", REACH SVHC=Unknown, Stock 1=118118, Supplier 1=Digi-Key, Viewing Angle=140°, Wavelength=570nm, Width=0.8mm
D4: library part LED-Yellow, "LED YELLOW CLEAR 0603 SMD", Case/Package=0603, Case Code (Metric)=1608, Forward Current=30mA, Forward Voltage=2V, Manufacturer="Wurth Electronics", Manufacturer Part Number=150060YS75000, Max Operating Temperature=85°C, Min Operating Temperature=-40°C, Package Quantity=4000, Supplier Part Number 1=732-4981-6-ND, Test Current=20mA, Case Code (Imperial)=0603, Color=Yellow, ComponentLink1Description=http://katalog.we-online.de/led/datasheet/150060YS75000.pdf?src-supplier=Newark, ComponentLink1URL=http://katalog.we-online.de/led/datasheet/150060YS75000.pdf?src-supplier=Newark, ComponentLink2Description=https://katalog.we-online.de/led/datasheet/150060YS75000.pdf?src-supplier=Digi-Key, ComponentLink2URL=https://katalog.we-online.de/led/datasheet/150060YS75000.pdf?src-supplier=Digi-Key, ComponentLink3Description=http://www.farnell.com/datasheets/1911348.pdf?src-supplier=Element14, ComponentLink3URL=http://www.farnell.com/datasheets/1911348.pdf?src-supplier=Element14, ComponentLink4Description=https://www.distrelec.biz/Web/Downloads/_t/ds/150060YS75000_eng_tds.pdf?mime=application%2Fpdf&src-supplier=Distrelec, ComponentLink4URL=https://www.distrelec.biz/Web/Downloads/_t/ds/150060YS75000_eng_tds.pdf?mime=application%2Fpdf&src-supplier=Distrelec, ComponentLink5Description=http://www.produktinfo.conrad.com/datenblaetter/750000-774999/759432-da-01-en-CHIPLED_0603_W_KL_GELB_150060YS75000.pdf?src-supplier=Conrad, ComponentLink5URL=http://www.produktinfo.conrad.com/datenblaetter/750000-774999/759432-da-01-en-CHIPLED_0603_W_KL_GELB_150060YS75000.pdf?src-supplier=Conrad, Dominant Wavelength=590nm, Height=0.7mm, Length=1.6mm, Lens Style=Clear,Rectangular, Luminous Intensity=120mcd, Mount="Surface Mount", Packaging="Tape and Reel", Pricing 1="1=0.14, 50=0.133, 100=0.114, 500=0.099 (USD)", REACH SVHC=Unknown, Stock 1=78, Supplier 1=Digi-Key, Viewing Angle=140°, Wavelength=590nm, Width=0.8mm
D5 D6: library part LED-Red, "LED RED CLEAR 0603 SMD", Case/Package=0603, Case Code (Metric)=1608, Forward Current=30mA, Forward Voltage=2V, Manufacturer="Wurth Electronics", Manufacturer Part Number=150060RS75000, Max Operating Temperature=85°C, Min Operating Temperature=-40°C, Package Quantity=1, Supplier Part Number 1=732-4978-6-ND, Test Current=20mA, Case Code (Imperial)=0603, Color=Red, ComponentLink1Description=https://katalog.we-online.de/led/datasheet/150060RS75000.pdf?src-supplier=Digi-Key, ComponentLink1URL=https://katalog.we-online.de/led/datasheet/150060RS75000.pdf?src-supplier=Digi-Key, ComponentLink2Description=http://www.produktinfo.conrad.com/datenblaetter/750000-774999/759428-da-01-en-CHIPLED_0603_W_KL_ROT_150060RS75000.pdf?src-supplier=Conrad, ComponentLink2URL=http://www.produktinfo.conrad.com/datenblaetter/750000-774999/759428-da-01-en-CHIPLED_0603_W_KL_ROT_150060RS75000.pdf?src-supplier=Conrad, Dominant Wavelength=625nm, Height=0.7mm, Length=1.6mm, Lens Style=Clear,Rectangular, Luminous Intensity=250mcd, Mount="Surface Mount", Packaging="Cut Tape", Pricing 1="1=0.14, 50=0.133, 100=0.114, 500=0.099 (USD)", REACH SVHC=Unknown, Stock 1=18518, Supplier 1=Digi-Key, Viewing Angle=140°, Wavelength=625nm, Width=0.8mm
J1 J2: library part 2X10PIN, "CONN HEADER R/A 20POS 2.54MM", Housing Color=Black, Manufacturer=Molex, Manufacturer Part Number=0901303120, Max Operating Temperature=125°C, Max Voltage Rating (AC)=350V, Min Operating Temperature=-55°C, Contact Material=Brass, Contact Plating=Tin,Lead, Depth=9.75mm, Housing Material=Polyester, Length=28.12mm, Max Voltage Rating (DC)=350V, Number of Rows=2, Orientation="Right Angle", Packaging=Tray, Pitch=2.54mm, Pricing 1="1=2.41, 10=2.19, 100=1.877, 500=1.56416, 1000=1.3407, 5000=1.18875, 10000=1.16194 (USD)", Stock 1=2147, Supplier 1=Digi-Key, Supplier Part Number 1=WM8268-ND, Termination=Solder
J3: library part 6PIN, "CONN HEADER R/A 6POS 2.54MM", Color=Black, Contact Resistance=30mR, Current Rating=3A, Flammability Rating="UL94 V-0", Insulation Resistance=1GR, Manufacturer=Molex, Manufacturer Part Number=70553-0040, Max Operating Temperature=105°C, Max Voltage Rating (AC)=250V, Min Operating Temperature=-40°C, Package Quantity=1200, ComponentLink1Description=http://uk.rs-online.com/webdocs/13c4/0900766b813c4993.pdf?src-supplier=RSComponents, ComponentLink1URL=http://uk.rs-online.com/webdocs/13c4/0900766b813c4993.pdf?src-supplier=RSComponents, ComponentLink2Description=http://www.molex.com/webdocs/datasheets/pdf/en-us/0705530040_PCB_HEADERS.pdf?src-supplier=Avnet+Europe, ComponentLink2URL=http://www.molex.com/webdocs/datasheets/pdf/en-us/0705530040_PCB_HEADERS.pdf?src-supplier=Avnet+Europe, ComponentLink3Description=http://www.farnell.com/datasheets/1844551.pdf?src-supplier=Farnell, ComponentLink3URL=http://www.farnell.com/datasheets/1844551.pdf?src-supplier=Farnell, ComponentLink4Description=http://www.mouser.com/ds/2/276/0705530040_PCB_HEADERS-172948.pdf?src-supplier=Mouser, ComponentLink4URL=http://www.mouser.com/ds/2/276/0705530040_PCB_HEADERS-172948.pdf?src-supplier=Mouser, ComponentLink5Description=http://www.farnell.com/cad/655744.pdf?src-supplier=Element14, ComponentLink5URL=http://www.farnell.com/cad/655744.pdf?src-supplier=Element14, ComponentLink6Description=http://www.jameco.com/Jameco/Products/ProdDS/1302975.pdf?src-supplier=Jameco, ComponentLink6URL=http://www.jameco.com/Jameco/Products/ProdDS/1302975.pdf?src-supplier=Jameco, Contact Material="Bronze,Copper Alloy,Brass", Contact Plating=Tin, Depth=13.59mm, ELV=Compliant, Gender=Male, Glow Wire Compliant=Non-compliant, Height=6.99mm, Housing Color=Black, Housing Material=Thermoplastic, Lead Free="Lead Free", Length=17.79mm, Material=Brass, Max Current Rating=3A, Mount="Through Hole", Number of Circuits=6, Number of Contacts=6, Number of Positions=6, Number of Rows=1, Orientation="Right Angle", Packaging=Rail/Tube, Pitch=2.54mm, Pricing 1="1=1.58, 10=1.434, 100=1.2289, 500=1.0241, 1000=0.8778, 5000=0.77832, 10000=0.76076 (USD)", Radiation Hardening=No, REACH SVHC=Unknown, Stock 1=2212, Supplier 1=Digi-Key, Supplier Part Number 1=WM4928-ND, Termination=Solder, Voltage Rating=250V, Voltage Rating (DC)=250V
J4: library part 2X11PIN, "CONN HEADER R/A 22POS 2MM", Color=Black, Contact Resistance=30mR, Current Rating=2A, Manufacturer=Hirose, Manufacturer Part Number=DF11-22DP-2DS(24), Max Operating Temperature=85°C, Min Operating Temperature=-30°C, Package Quantity=20, Voltage Rating=250V, ComponentLink1Description=http://docs-usa.electrocomponents.com/techlib:/itc_doclist_US.htm?stockno=6888963&src-supplier=Allied+Electronics, ComponentLink1URL=http://docs-usa.electrocomponents.com/techlib:/itc_doclist_US.htm?stockno=6888963&src-supplier=Allied+Electronics, ComponentLink2Description=https://www.verical.com/server-webapp/html/getDatasheet?partID=456315&src-supplier=Verical, ComponentLink2URL=https://www.verical.com/server-webapp/html/getDatasheet?partID=456315&src-supplier=Verical, ComponentLink3Description=http://www.hirose.co.jp/cataloge_hp/en_DF11_20130411.pdf?src-supplier=Future+Electronics, ComponentLink3URL=http://www.hirose.co.jp/cataloge_hp/en_DF11_20130411.pdf?src-supplier=Future+Electronics, ComponentLink4Description=http://www.farnell.com/datasheets/91550.pdf?src-supplier=Element14, ComponentLink4URL=http://www.farnell.com/datasheets/91550.pdf?src-supplier=Element14, ComponentLink5Description=http://www.mouser.com/ds/2/185/DF11_catalog-1064296.pdf?src-supplier=Mouser, ComponentLink5URL=http://www.mouser.com/ds/2/185/DF11_catalog-1064296.pdf?src-supplier=Mouser, ComponentLink6Description=http://documents.rs-components.com/techlib://itc_doclist_GB.htm?stockno=6056598&src-supplier=RSComponents, ComponentLink6URL=http://documents.rs-components.com/techlib://itc_doclist_GB.htm?stockno=6056598&src-supplier=RSComponents, Connector Type="Male Pin", Contact Material="Brass,Copper Alloy,Tin", Contact Mating Length=0.118inch, Contact Plating=Tin, Depth=10mm, Fastening Type=Detent, Gender=Male, Height=5mm, Housing Color=Black, Housing Material=Polyamide, Lead Free="Lead Free", Length=24mm, Max Current Rating=2A, Mount="Through Hole", Number of Contacts=22, Number of Positions=22, Number of Rows=2, Orientation="Right Angle", Packaging=Rail/Tube, Pitch=2mm, Pricing 1="1=1.19, 10=1.046, 100=0.902, 500=0.738, 1000=0.656, 5000=0.574, 10000=0.5453 (USD)", Radiation Hardening=No, Row Spacing=0.079inch, Stock 1=2198, Supplier 1=Digi-Key, Supplier Part Number 1=H10253-ND, Termination=Solder
J5: library part 16PIN, "CONN HEADER R/A 16POS 2.54MM", Color=Black, Contact Resistance=30mR, Manufacturer=Molex, Manufacturer Part Number=0705530015, Max Operating Temperature=105°C, Min Operating Temperature=-40°C, ComponentLink1Description=http://www.molex.com/pdm_docs/sd/705530015_sd.pdf?src-supplier=Digi-Key, ComponentLink1URL=http://www.molex.com/pdm_docs/sd/705530015_sd.pdf?src-supplier=Digi-Key, ComponentLink2Description=http://www.molex.com/webdocs/datasheets/pdf/en-us/0705530015_PCB_HEADERS.pdf?src-supplier=Avnet, ComponentLink2URL=http://www.molex.com/webdocs/datasheets/pdf/en-us/0705530015_PCB_HEADERS.pdf?src-supplier=Avnet, Connector Type="Male Pin", Contact Material=Bronze, Contact Mating Length=0.24inch, Contact Plating=Gold, Depth=13.59mm, Housing Color=Black, Housing Material=Polyester, Length=43.19mm, Mount="Through Hole", Number of Positions=16, Number of Rows=1, Orientation="Right Angle", Packaging=Rail/Tube, Pitch=0.1inch, Pricing 1="1=8.86, 10=8.47, 100=7.1225, 500=5.9675, 1000=5.2745 (USD)", Radiation Hardening=No, Stock 1=225, Supplier 1=Digi-Key, Supplier Part Number 1=WM4914-ND, Termination=Solder
L1: library part 10uH-0.6A, "FIXED IND 10UH 600MA 504 MOHM", Case/Package=1210, Current Rating=600mA, DC Resistance (DCR)=504mR, Manufacturer=TDK, Manufacturer Part Number=NLCV32T-100K-EFRD, Max Operating Temperature=125°C, Min Operating Temperature=-40°C, Ratings=AEC-Q200, Resistor Type=Wirewound, Self Resonant Frequency=30MHz, Supplier Part Number 1=445-175563-6-ND, Test Frequency=2.52MHz, Tolerance=10%, ComponentLink1Description=https://product.tdk.com/info/en/catalog/datasheets/inductor_automotive_decoupling_nlcv32-efrd_en.pdf?src-supplier=Digi-Key, ComponentLink1URL=https://product.tdk.com/info/en/catalog/datasheets/inductor_automotive_decoupling_nlcv32-efrd_en.pdf?src-supplier=Digi-Key, ComponentLink2Description=http://www.farnell.com/datasheets/2261959.pdf?src-supplier=Farnell, ComponentLink2URL=http://www.farnell.com/datasheets/2261959.pdf?src-supplier=Farnell, Core Material=Ferrite, Height - Seated (Max)=0.094inch, Inductance=10uH, Length=0.126inch, Mount="Surface Mount", Packaging="Tape and Reel", Pricing 1="1=0.3, 10=0.264, 25=0.2312, 50=0.198, 100=0.1815, 250=0.165, 500=0.1551, 1000=0.1188 (USD)", Shielding=Unshielded, Stock 1=3400, Supplier 1=Digi-Key, Width=0.098inch
R1 R2: library part 0603-5KR, "RES SMD 4.99K OHM 1% 1/10W 0603", Case/Package=0603, Case Code (Metric)=1608, Manufacturer=Bourns, Manufacturer Part Number=CR0603-FX-4991ELF, Max Operating Temperature=155°C, Max Power Dissipation=100mW, Min Operating Temperature=-55°C, Package Quantity=1, Resistance=4.99kR, Supplier Part Number 1=CR0603-FX-4991ELFDKR-ND, Temperature Coefficient=100ppm/°C, Tolerance=1%, Voltage Rating=50V, Case Code (Imperial)=0603, ComponentLink1Description=https://www.bourns.com/docs/Product-Datasheets/CHPREZTR.pdf?src-supplier=Digi-Key, ComponentLink1URL=https://www.bourns.com/docs/Product-Datasheets/CHPREZTR.pdf?src-supplier=Digi-Key, ComponentLink2Description=http://www.bourns.com/pdfs/chpreztr.pdf?src-supplier=Avnet, ComponentLink2URL=http://www.bourns.com/pdfs/chpreztr.pdf?src-supplier=Avnet, Composition="Thick Film", Contact Plating=Tin, Features="Moisture Resistant", Height=0.022inch, Length=0.063inch, Mount="Surface Mount", Number of Terminations=2, Packaging="Tape and Reel", Power Rating=100mW, Pricing 1="1=0.1, 10=0.02, 25=0.0144, 50=0.011, 100=0.0082, 250=0.00624, 500=0.00498, 1000=0.00367 (USD)", Radiation Hardening=No, Stock 1=70557, Supplier 1=Digi-Key, Termination=SMD/SMT, Thickness=457um, Width=0.8mm
R3 R4: library part 0603-15KR, "RES SMD 15K OHM 1% 1/10W 0603", Case/Package=0603, Case Code (Metric)=1608, Manufacturer=Yageo, Manufacturer Part Number=RC0603FR-0715KL, Max Operating Temperature=155°C, Max Power Dissipation=100mW, Min Operating Temperature=-55°C, Package Quantity=1, Resistance=15kR, Supplier Part Number 1=311-15.0KHRDKR-ND, Temperature Coefficient=100ppm/°C, Tolerance=1%, Voltage Rating=50V, Case Code (Imperial)=0603, ComponentLink1Description=http://www.yageo.com/documents/recent/PYu-RC_Group_51_RoHS_L_10.pdf?src-supplier=Digi-Key, ComponentLink1URL=http://www.yageo.com/documents/recent/PYu-RC_Group_51_RoHS_L_10.pdf?src-supplier=Digi-Key, ComponentLink2Description=http://www.yageo.com/documents/recent/PYu-RC_Group_51_RoHS_L_9.pdf?src-supplier=Digi-Key, ComponentLink2URL=http://www.yageo.com/documents/recent/PYu-RC_Group_51_RoHS_L_9.pdf?src-supplier=Digi-Key, ComponentLink3Description=https://www.verical.com/server-webapp/html/getDatasheet?partID=327895&src-supplier=Verical, ComponentLink3URL=https://www.verical.com/server-webapp/html/getDatasheet?partID=327895&src-supplier=Verical, Composition="Thick Film", Depth=0.8mm, Features="Moisture Resistant", Height=0.022inch, Lead Free="Lead Free", Length=1.6mm, Military Standard=Not, Number of Pins=2, Number of Terminations=2, Packaging="Tape and Reel", Power Rating=100mW, Pricing 1="1=0.1, 10=0.023, 100=0.0094, 1000=0.00421, 2500=0.00366 (USD)", REACH SVHC=Unknown, Stock 1=4670222, Supplier 1=Digi-Key, Termination=SMD/SMT, Voltage Rating (DC)=50V, Width=0.031inch
R5 R6 R7: library part 0805-2KR, "RES SMD 2K OHM 1% 1/8W 0805", Case/Package=0805, Manufacturer="Yageo Phycomp", Manufacturer Part Number=RC0805FR-0720KL, Max Operating Temperature=155°C, Min Operating Temperature=-55°C, Power Rating=125mW, Resistance=20000R, Supplier Part Number 1=311-20.0KCRDKR-ND, Temperature Coefficient=100ppm/°C, Tolerance=1%, Voltage Rating (DC)=150V, ComponentLink1Description=http://www.yageo.com/documents/recent/PYu-RC_Group_51_RoHS_L_10.pdf?src-supplier=Digi-Key, ComponentLink1URL=http://www.yageo.com/documents/recent/PYu-RC_Group_51_RoHS_L_10.pdf?src-supplier=Digi-Key, ComponentLink2Description=http://www.yageo.com/documents/recent/PYu-RC_Group_51_RoHS_L_9.pdf?src-supplier=Digi-Key, ComponentLink2URL=http://www.yageo.com/documents/recent/PYu-RC_Group_51_RoHS_L_9.pdf?src-supplier=Digi-Key, ComponentLink3Description=http://documents.rs-components.com/techlib://itc_doclist_GB.htm?stockno=6182912&src-supplier=RSComponents, ComponentLink3URL=http://documents.rs-components.com/techlib://itc_doclist_GB.htm?stockno=6182912&src-supplier=RSComponents, ComponentLink4Description=http://www.farnell.com/datasheets/2167052.pdf?src-supplier=Element14, ComponentLink4URL=http://www.farnell.com/datasheets/2167052.pdf?src-supplier=Element14, ComponentLink5Description=http://www.mouser.com/ds/2/447/Yageo_08112016_RC0805-968729.pdf?src-supplier=Mouser, ComponentLink5URL=http://www.mouser.com/ds/2/447/Yageo_08112016_RC0805-968729.pdf?src-supplier=Mouser, Depth=1.25mm, Height=0.5mm, Lead Free="Lead Free", Length=2mm, Mount="Surface Mount", Number of Pins=2, Packaging="Cut Tape", Pricing 1="1=0.1, 10=0.04, 100=0.0163, 1000=0.00731, 2500=0.00635 (USD)", Stock 1=4531239, Supplier 1=Digi-Key, Width=1.25mm
R8 R9 R10: library part 0805-1KR, "RES SMD 1K OHM 1% 1/8W 0805", Case/Package=0805, Case Code (Metric)=2012, Manufacturer=Yageo, Manufacturer Part Number=RC0805FR-071KL, Max Operating Temperature=155°C, Max Power Dissipation=125mW, Min Operating Temperature=-55°C, Package Quantity=1, Resistance=1kR, Supplier Part Number 1=311-1.00KCRDKR-ND, Temperature Coefficient=100ppm/°C, Tolerance=1%, Voltage Rating=150V, Case Code (Imperial)=0805, ComponentLink1Description=http://www.yageo.com/documents/recent/PYu-RC_Group_51_RoHS_L_10.pdf?src-supplier=Digi-Key, ComponentLink1URL=http://www.yageo.com/documents/recent/PYu-RC_Group_51_RoHS_L_10.pdf?src-supplier=Digi-Key, ComponentLink2Description=http://www.farnell.com/datasheets/1686128.pdf?src-supplier=Element14, ComponentLink2URL=http://www.farnell.com/datasheets/1686128.pdf?src-supplier=Element14, ComponentLink3Description=http://www.yageo.ru/pdf/RC0805.pdf?src-supplier=Future+Electronics, ComponentLink3URL=http://www.yageo.ru/pdf/RC0805.pdf?src-supplier=Future+Electronics, ComponentLink4Description=http://www.farnell.com/datasheets/2167052.pdf?src-supplier=Element14, ComponentLink4URL=http://www.farnell.com/datasheets/2167052.pdf?src-supplier=Element14, Composition="Thick Film", Depth=1.25mm, Features="Moisture Resistant", Height=0.024inch, Lead Free="Lead Free", Length=0.079inch, Military Standard=Not, Number of Pins=2, Number of Terminations=2, Packaging="Tape and Reel", Power Rating=125mW, Pricing 1="1=0.1, 10=0.04, 100=0.0163, 1000=0.00731, 2500=0.00635 (USD)", REACH SVHC=Unknown, Stock 1=21491700, Supplier 1=Digi-Key, Termination=SMD/SMT, Voltage Rating (DC)=150V, Width=0.049inch
R11 R12 R13 R14 R15 R16: library part 0805-10KR, "RES SMD 10K OHM 1% 1/8W 0805", Case/Package=0805, Case Code (Metric)=2012, Manufacturer=Yageo, Manufacturer Part Number=RC0805FR-0710KL, Max Operating Temperature=155°C, Max Power Dissipation=125mW, Min Operating Temperature=-55°C, Package Quantity=1, Resistance=10kR, Supplier Part Number 1=311-10.0KCRCT-ND, Temperature Coefficient=100ppm/°C, Tolerance=1%, Voltage Rating=150V, Case Code (Imperial)=0805, ComponentLink1Description=http://www.yageo.com/documents/recent/PYu-RC_Group_51_RoHS_L_9.pdf?src-supplier=Mouser, ComponentLink1URL=http://www.yageo.com/documents/recent/PYu-RC_Group_51_RoHS_L_9.pdf?src-supplier=Mouser, ComponentLink2Description=http://www.farnell.com/datasheets/2167052.pdf?src-supplier=Element14, ComponentLink2URL=http://www.farnell.com/datasheets/2167052.pdf?src-supplier=Element14, ComponentLink3Description=http://www.yageo.com/documents/recent/PYu-RC_Group_51_RoHS_L_10.pdf?src-supplier=Digi-Key, ComponentLink3URL=http://www.yageo.com/documents/recent/PYu-RC_Group_51_RoHS_L_10.pdf?src-supplier=Digi-Key, ComponentLink4Description=http://www.yageo.ru/pdf/RC0805.pdf?src-supplier=Future+Electronics, ComponentLink4URL=http://www.yageo.ru/pdf/RC0805.pdf?src-supplier=Future+Electronics, Composition="Thick Film", Depth=1.25mm, Features="Moisture Resistant", Height=0.024inch, Lead Free="Lead Free", Length=2mm, Military Standard=Not, Number of Terminations=2, Packaging="Tape and Reel", Power Rating=125mW, Pricing 1="1=0.1, 10=0.04, 100=0.0163, 1000=0.00731, 2500=0.00635 (USD)", REACH SVHC=Unknown, Stock 1=26112993, Supplier 1=Digi-Key, Termination=SMD/SMT, Width=0.049inch
R17: library part 0603-120R, "RES SMD 120 OHM 1% 1/10W 0603", Case/Package=0603, Case Code (Metric)=1608, Manufacturer=Yageo, Manufacturer Part Number=RC0603FR-07120RL, Max Operating Temperature=155°C, Max Power Dissipation=100mW, Min Operating Temperature=-55°C, Package Quantity=1, Supplier Part Number 1=311-120HRDKR-ND, Temperature Coefficient=100ppm/°C, Tolerance=1%, Voltage Rating=50V, Case Code (Imperial)=0603, ComponentLink1Description=http://www.yageo.com/documents/recent/PYu-RC_Group_51_RoHS_L_10.pdf?src-supplier=Digi-Key, ComponentLink1URL=http://www.yageo.com/documents/recent/PYu-RC_Group_51_RoHS_L_10.pdf?src-supplier=Digi-Key, ComponentLink2Description=http://www.farnell.com/datasheets/2167052.pdf?src-supplier=Element14, ComponentLink2URL=http://www.farnell.com/datasheets/2167052.pdf?src-supplier=Element14, ComponentLink3Description=http://www.farnell.com/datasheets/1868787.pdf?src-supplier=Element14, ComponentLink3URL=http://www.farnell.com/datasheets/1868787.pdf?src-supplier=Element14, ComponentLink4Description=http://www.farnell.com/datasheets/443971.pdf?src-supplier=Element14, ComponentLink4URL=http://www.farnell.com/datasheets/443971.pdf?src-supplier=Element14, Composition="Thick Film", Depth=0.8mm, Features="Moisture Resistant", Height=0.022inch, Lead Free="Lead Free", Length=1.6mm, Military Standard=Not, Number of Pins=2, Number of Terminations=2, Packaging="Tape and Reel", Power Rating=100mW, Pricing 1="1=0.1, 10=0.023, 100=0.0094, 1000=0.00421, 2500=0.00366 (USD)", REACH SVHC="No SVHC", Resistance=120R, Stock 1=1047274, Supplier 1=Digi-Key, Termination=SMD/SMT, Voltage Rating (DC)=50V, Width=0.031inch
R18 R22 R23 R24 R25 R26 R27 R29 R30 R31 R32 R33 R34 R36 R37 R38 R39 R40 R41: library part 0603-10KR, "RES SMD 10K OHM 5% 1/10W 0603", Case/Package=0603, Case Code (Metric)=1608, Manufacturer=Yageo, Manufacturer Part Number=RC0603JR-0710KL, Max Operating Temperature=155°C, Max Power Dissipation=100mW, Min Operating Temperature=-55°C, Resistance=10kR, Supplier Part Number 1=311-10KGRDKR-ND, Temperature Coefficient=100ppm/°C, Tolerance=5%, Voltage Rating=50V, Case Code (Imperial)=0603, ComponentLink1Description=http://www.yageo.com/documents/recent/PYu-RC_Group_51_RoHS_L_10.pdf?src-supplier=Digi-Key, ComponentLink1URL=http://www.yageo.com/documents/recent/PYu-RC_Group_51_RoHS_L_10.pdf?src-supplier=Digi-Key, Composition="Thick Film", Contact Plating=Tin,Matte, Depth=0.8mm, Features="Moisture Resistant", Height - Seated (Max)=0.022inch, Lead Free="Lead Free", Length=0.063inch, Military Standard=Not, Number of Pins=2, Number of Terminations=2, Packaging="Tape and Reel", Power Rating=100mW, Pricing 1="1=0.1, 10=0.019, 100=0.0077, 1000=0.00347, 2500=0.00301 (USD)", Radiation Hardening=No, REACH SVHC=Unknown, Stock 1=3006558, Supplier 1=Digi-Key, Termination=SMD/SMT, Voltage Rating (DC)=50V, Width=0.031inch
R19: library part 0603-0R, "RES SMD 0 OHM JUMPER 1/10W 0603", Case/Package=0603, Case Code (Metric)=1608, Manufacturer=Yageo, Manufacturer Part Number=RC0603JR-070RL, Max Operating Temperature=155°C, Min Operating Temperature=-55°C, Package Quantity=5000, Power Rating=100mW, Resistance=0mR, Supplier Part Number 1=311-0.0GRCT-ND, Temperature Coefficient=200ppm/°C, Tolerance=1%, Voltage Rating=50V, Case Code (Imperial)=0603, ComponentLink1Description=http://www.farnell.com/datasheets/2167052.pdf?src-supplier=Element14, ComponentLink1URL=http://www.farnell.com/datasheets/2167052.pdf?src-supplier=Element14, ComponentLink2Description=https://www.verical.com/server-webapp/html/getDatasheet?partID=329462&src-supplier=Verical, ComponentLink2URL=https://www.verical.com/server-webapp/html/getDatasheet?partID=329462&src-supplier=Verical, ComponentLink3Description=http://www.yageo.com/documents/recent/PYu-RC_Group_51_RoHS_L_9.pdf?src-supplier=Mouser, ComponentLink3URL=http://www.yageo.com/documents/recent/PYu-RC_Group_51_RoHS_L_9.pdf?src-supplier=Mouser, ComponentLink4Description=http://www.farnell.com/datasheets/443971.pdf?src-supplier=Element14, ComponentLink4URL=http://www.farnell.com/datasheets/443971.pdf?src-supplier=Element14, ComponentLink5Description=http://documents.rs-components.com/techlib://itc_doclist_GB.htm?stockno=6515918&src-supplier=RSComponents, ComponentLink5URL=http://documents.rs-components.com/techlib://itc_doclist_GB.htm?stockno=6515918&src-supplier=RSComponents, Composition="Thick Film", Contact Plating=Tin,Matte, Depth=0.8mm, Height=0.45mm, Lead Free="Lead Free", Length=1.6mm, Military Standard=Not, Number of Pins=2, Packaging="Tape and Reel", Pricing 1="1=0.1, 10=0.019, 25=0.0136, 50=0.0104, 100=0.0077, 250=0.00588, 500=0.00472, 1000=0.00347 (USD)", Radiation Hardening=No, REACH SVHC="No SVHC", Stock 1=25658294, Supplier 1=Digi-Key, Termination=SMD/SMT, Voltage Rating (DC)=50V, Width=0.8mm